# EAGLE board driver (EAGLE 9.6.2)
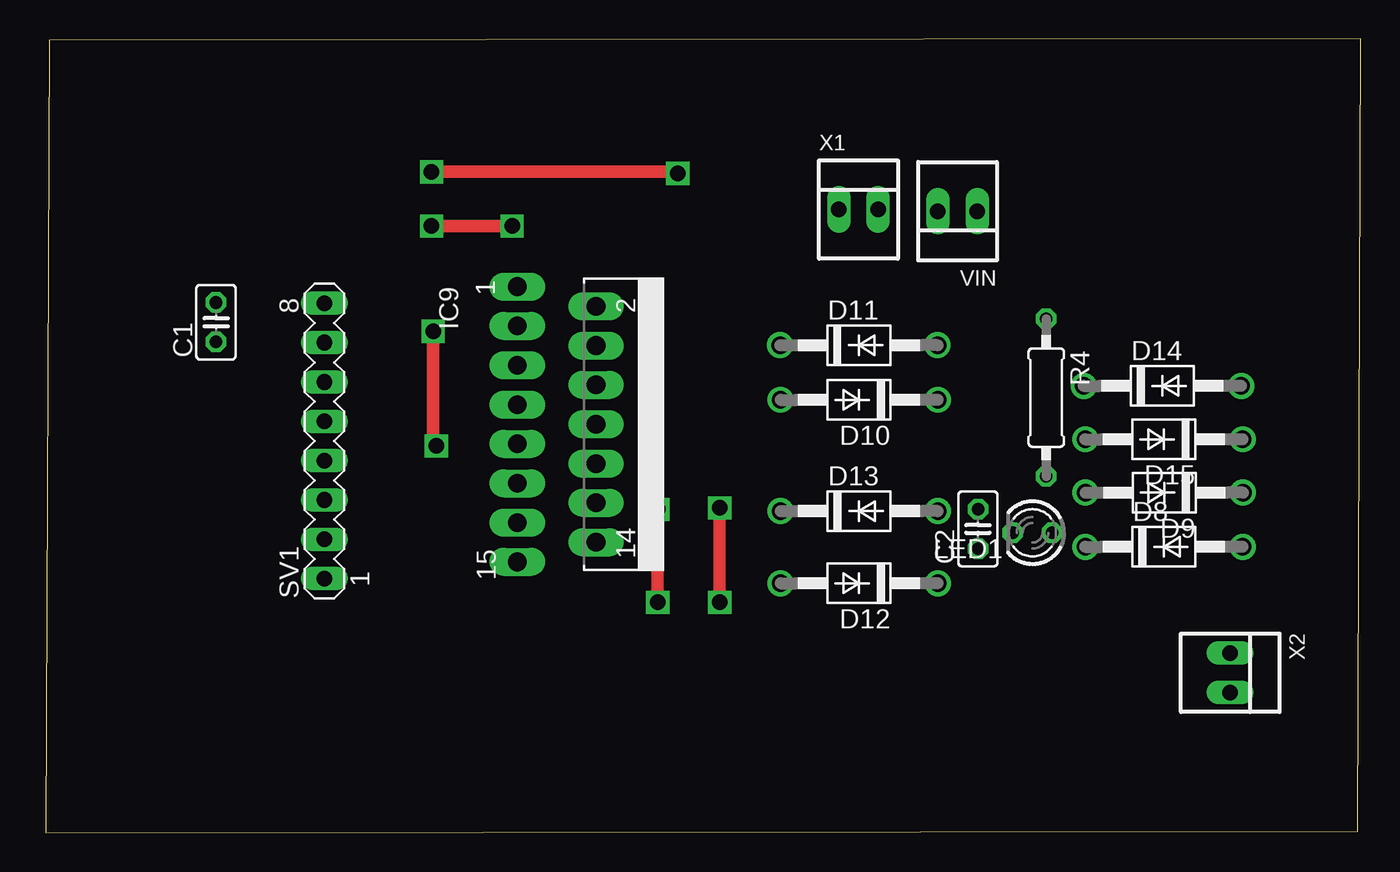
[diagram p0: board, top side]
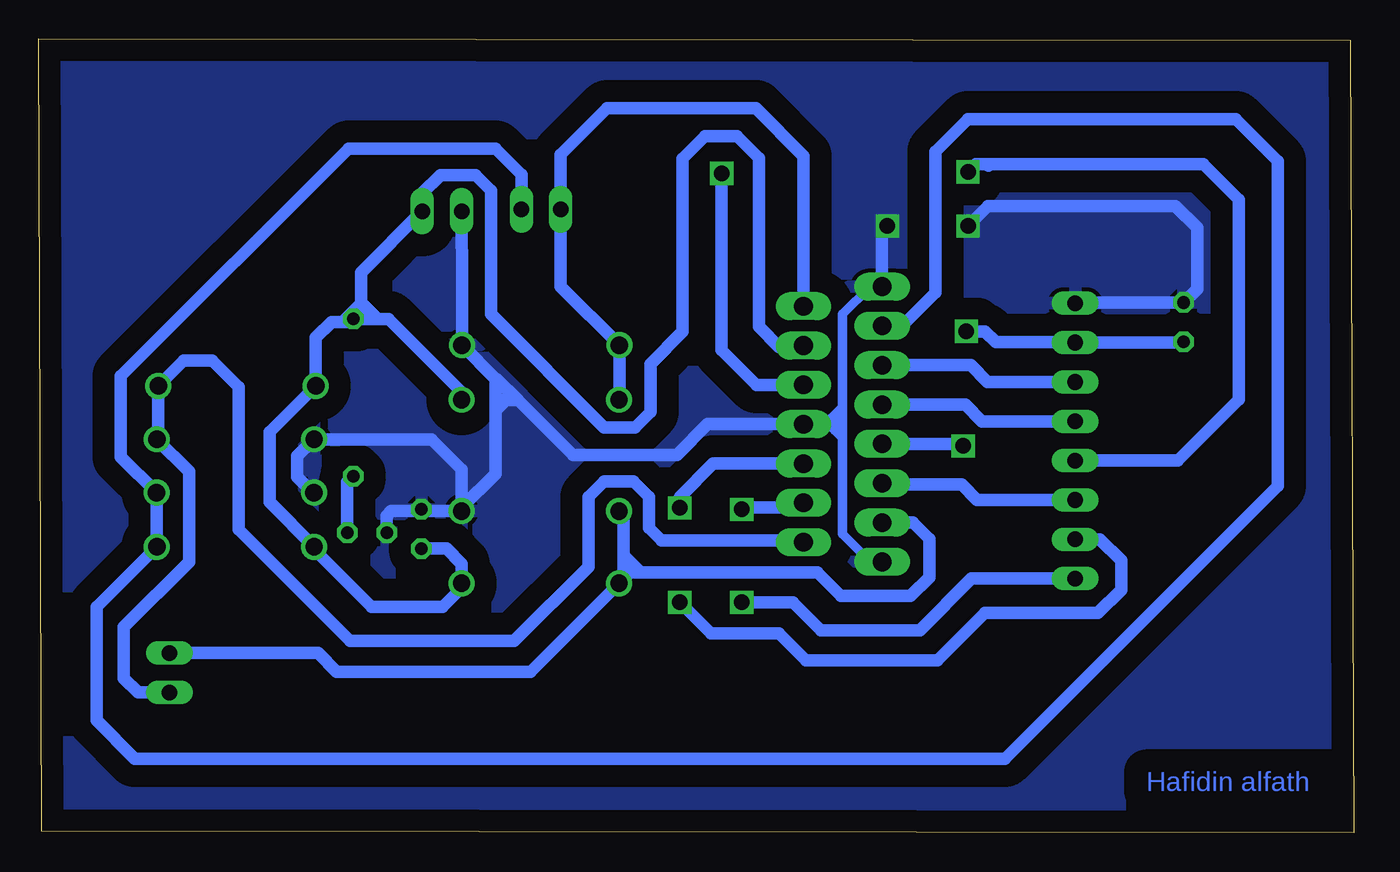
[diagram p1: board, bottom side, seen from below]

Size 84.9 x 51.3 mm. Coordinates in mm from the lower left corner, seen from the top.
Outline: 0,0 84.7,0.1 84.9,51.3 0.2,51.2 0,0
Copper layers (1*16): Top 0.035mm / dielectric 1.5mm / Bottom 0.035mm
Design rules "default": minimum track width 6mil, minimum drill 0.35mm, track to track 6mil, track to pad 6mil, pad to pad 6mil, via to via 6mil, smd to smd 6mil, copper to edge 40mil, drill to drill 6mil, minimum pad ring 10mil, minimum via ring 8mil, stop-mask expansion 4mil, vias tented up to drill 0mil, thermal gap 10mil

## Footprints (pad centres in the part's own frame; a part is rotated, then mirrored left to right if it is on the bottom)
C025-025X050 = drill 0.813 octagon: 1 -1.27,0; 2 1.27,0
DO41-10 = drill 1.118: A 5.08,0; C -5.08,0
MULTIWATT-15 = drill 1.2 long: 1 -8.89,-7.62; 2 -7.62,-2.54; 3 -6.35,-7.62; 4 -5.08,-2.54; 5 -3.81,-7.62; 6 -2.54,-2.54; 7 -1.27,-7.62; 8 0,-2.54; 9 1.27,-7.62; 10 2.54,-2.54; 11 3.81,-7.62; 12 5.08,-2.54; 13 6.35,-7.62; 14 7.62,-2.54; 15 8.89,-7.62
LED3MM = drill 0.813 octagon: A -1.27,0; K 1.27,0
0207/10 = drill 0.813 octagon: 1 -5.08,0; 2 5.08,0
MA08-1 = drill 1.016 long: 1 -8.89,0; 2 -6.35,0; 3 -3.81,0; 4 -1.27,0; 5 1.27,0; 6 3.81,0; 7 6.35,0; 8 8.89,0
22-23-2021 = drill 1 long: 1 -1.27,0; 2 1.27,0

## Placement (x,y rotation side)
C1  100nF  [C025-025X050]  10.98,32.99 90 top
C2  100nF  [C025-025X050]  60.18,19.64 90 top
D8  1N4004  [DO41-10]  72.19,18.49 0 top
D9  1N4004  [DO41-10]  72.21,21.98 180 top
D10  1N4004  [DO41-10]  52.51,27.98 180 top
D11  1N4004  [DO41-10]  52.49,31.5 0 top
D12  1N4004  [DO41-10]  52.51,16.13 180 top
D13  1N4004  [DO41-10]  52.51,20.79 0 top
D14  1N4004  [DO41-10]  72.09,28.88 0 top
D15  1N4004  [DO41-10]  72.19,25.43 180 top
IC9  L298  [MULTIWATT-15]  38.06,26.4 270 top
LED1  [LED3MM]  63.7,19.39 180 top
R4  330  [0207/10]  64.59,28.12 270 top
SV1  [MA08-1]  17.97,25.32 90 top
VIN  22-23-2021  [22-23-2021]  58.86,40.16 180 top
X1  22-23-2021  [22-23-2021]  52.46,40.27 0 top
X2  22-23-2021  [22-23-2021]  76.47,10.35 270 top

## Library data of the parts
C1 C2 R4 = rcl
D8-D15 = diode
IC9 = st-microelectronics
LED1 = led
SV1 = con-lstb; OC_FARNELL: unknown; OC_NEWARK: unknown
VIN X1 X2 = con-molex; MF: MOLEX; MPN: 22-23-2021; OC_FARNELL: 1462926; OC_NEWARK: 25C3832

## Nets
GND: C1.2 C2.2 D9.A D11.A D13.A D15.A IC9.1 IC9.8 IC9.15 LED1.K SV1.8 VIN.2
N$1: IC9.5 SV1.6
N$3: IC9.7 SV1.5
N$5: IC9.12 SV1.1
N$8: IC9.10 SV1.2
N$16: IC9.6 SV1.4
N$17: IC9.11 SV1.3
N$44: LED1.A R4.2
N$204: D8.A D9.C IC9.3 X1.2
N$205: D10.A D11.C IC9.2 X1.1
N$206: D12.A D13.C IC9.13 X2.1
N$207: D14.A D15.C IC9.14 X2.2
VCC: C1.1 IC9.9 SV1.7
VDD: C2.1 D8.C D10.C D12.C D14.C IC9.4 R4.1 VIN.1

## Tracks (layer width: path | path; a pad name or v marks a point on that pad's centre or on a via)
GND  (via drill 1)
  Top 0.813: v24.9,39.2 v30.1,39.2
  Bottom 0.61: IC9.15 31.21,17.51 33,19.3 33,25.5 | 33,25.5 33.5,26 | 33.5,26 33.9,26.4 | IC9.1 31.21,35.29 33,33.5 33,27.5 | 33,27.5 33,26.8 | 33,26.8 33,26.5 | 33,26.5 33,25.5 | 33,27.5 33.7,26.8 | 33.7,26.8 34,26.5 33,26.5 | 33.9,26.4 33.6,26.4 33.7,26.3 | 33.9,26.4 IC9.8 | 33,26.8 33.7,26.8 | 33.5,26 33,26.5
  Bottom 0.813: LED1.K 62.43,20.49 62.13,20.79 D13.A | D13.A 57.59,23.49 59.53,25.43 D15.A 68.2,24.34 68.2,23 67.18,21.98 D9.A | VIN.2 57.57,35.26 D11.A 55.4,29.33 | 55.4,27.25 55.4,23.2 57.59,21.01 D13.A | 55.4,27.25 55.4,27.8 | 55.4,27.8 55.4,29.33 | 55.4,29.33 55.33,29.33 53.95,27.95 | 53.95,27.95 50.4,24.4 43.7,24.4 41.7,26.4 IC9.8 | 53.95,27.95 54.7,27.95 | 54.7,27.95 55.25,27.95 55.4,27.8 | 54.7,27.95 55.4,27.25 | C2.2 60.06,20.79 D13.A | IC9.15 | SV1.8 17.92,34.26 C1.2 10.1,35.14 10.1,39.1 11.5,40.5 23.6,40.5 v24.9,39.2 | IC9.1 30.44,38.86 v30.1,39.2
  pour Bottom (isolate 1.422): 0,51.3 0,0.1 84.7,0.1 84.7,51.3
N$1
  Bottom 0.813: SV1.6 23.63,29.13 24.71,30.21 IC9.5
N$3
  Bottom 0.813: SV1.5 23.99,26.59 25.07,27.67 IC9.7
N$5  (via drill 1)
  Top 0.813: v39.5,20.9 v39.5,14.9
  Bottom 0.813: SV1.1 24.67,16.43 28,13.1 34.4,13.1 36.2,14.9 v39.5,14.9 | IC9.12 35.82,21.02 39.5,21.02 v39.5,20.9
N$8  (via drill 1)
  Top 0.813: v43.5,14.9 v43.5,21
  Bottom 0.813: SV1.2 16.37,18.97 15,17.6 15,15.7 16.5,14.2 23.8,14.2 26.86,11.14 35.34,11.14 37.1,12.9 41.5,12.9 v43.5,14.9 | IC9.10 41.35,23.86 43.5,21.71 v43.5,21
N$16  (via drill 1)
  Top 0.813: v24.9,42.7 40.7,42.7 v40.8,42.6
  Bottom 0.813: SV1.4 11.35,24.05 7.4,28 7.4,40.9 9.7,43.2 23.49,43.2 | 23.59,43.1 23.49,43.2 | IC9.6 38.54,28.94 40.8,31.2 v40.8,42.6 | 23.49,43.2 24.4,43.2 v24.9,42.7
N$17
  Bottom 0.813: SV1.3 24.31,21.51 25.3,22.5 30.7,22.5 30.9,22.3 30.73,22.3 IC9.11
N$44
  Bottom 0.813: R4.2 64.97,22.66 LED1.A
N$204
  Bottom 0.813: X1.2 53.73,42.53 55.4,44.2 64.9,44.2 79.6,29.5 79.6,24.29 D9.C 77.27,21.96 D8.A 81.17,14.59 81.17,7.27 78.7,4.8 22.5,4.8 4.9,22.4 4.9,43.4 7.6,46.1 24.9,46.1 27,44 27,34.9 29.15,32.75 IC9.3
N$205
  Bottom 0.813: IC9.2 35.52,43.72 38.6,46.8 48.2,46.8 51.19,43.81 X1.1 51.19,35.28 D11.C 47.41,28 D10.A
N$206
  Bottom 0.813: D13.C 47.13,20.49 47.13,17.96 | 47.13,17.96 47.13,16.43 D12.A | X2.1 66.87,11.62 65.67,10.42 53.14,10.42 D12.A | IC9.13 28.45,20.05 27.4,19 27.4,16.5 28.6,15.3 33.1,15.3 34.63,16.83 46,16.83 | D12.A 46.73,16.83 46,16.83 | 46,16.83 47.13,17.96
N$207
  Bottom 0.813: IC9.14 35.62,18.88 44.68,18.88 45.5,19.7 45.5,21.7 46.5,22.7 48.4,22.7 49.4,21.7 49.4,17.2 54.2,12.4 64.8,12.4 72,19.6 72,28.8 73.7,30.5 75.55,30.5 D14.A 77.17,25.53 D15.C 75.2,23.36 75.2,17.5 79.4,13.3 79.4,10 78.48,9.08 X2.2
VCC  (via drill 1)
  Top 0.813: v25.2,25 25,25.2 v25,32.4
  Bottom 0.813: C1.1 11.03,31.67 SV1.7 18,31.7 23.1,31.7 23.8,32.4 v25,32.4 | v25.2,25 25.33,25.13 IC9.9
VDD
  Bottom 0.813: D10.C 57.59,28.48 62.31,33.2 63,33.2 | R4.1 64.81,33.2 64.61,33 65.3,33 | 65.3,33 66,33 67.01,31.99 D14.C 70,25.89 70,21.38 D8.C 67.11,18.31 63.4,14.6 58.82,14.6 57.59,15.83 D12.C 57.59,17.39 58.57,18.37 C2.1 | R4.1 63,33.2 | R4.1 64.09,33.7 64.09,34.21 | 64.09,34.29 64.09,36.2 VIN.1 60.13,41.33 58.96,42.5 56.7,42.5 55.7,41.5 55.7,33.5 48.4,26.2 46.4,26.2 45.4,27.2 45.4,30.3 43.32,32.38 43.32,43.56 41.88,45 39.8,45 38.4,43.6 38.4,32.7 37.1,31.4 37.02,31.48 IC9.4 | 63,33.2 64.09,34.29 | 64.09,34.29 64.09,34.21 | 64.09,34.21 65.3,33

## Text on the board
Bottom: Hafidin alfath